# Altium PCB H.PcbDoc
Units mm, origin at the board's own origin, x right, y up, seen from the top; angles counter-clockwise.
Board outline 20.95 x 16.51 mm, 2 copper layers (Top Layer, Bottom Layer); 21 components, 10 nets, 42 pads, 7 vias.
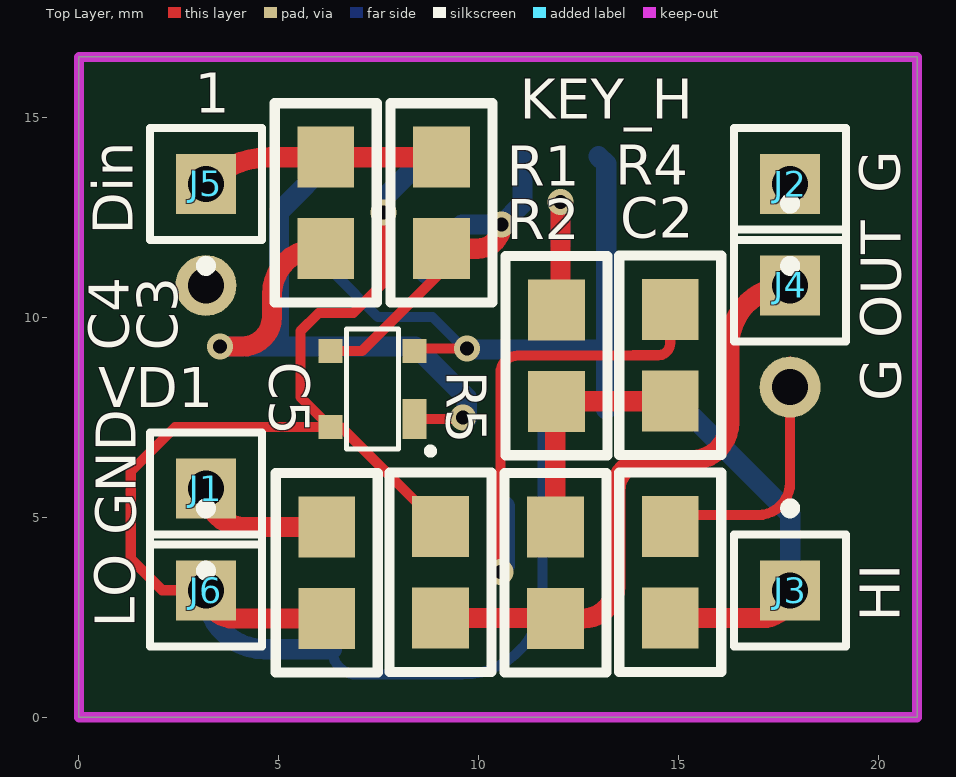
[diagram p0: Top Layer view]
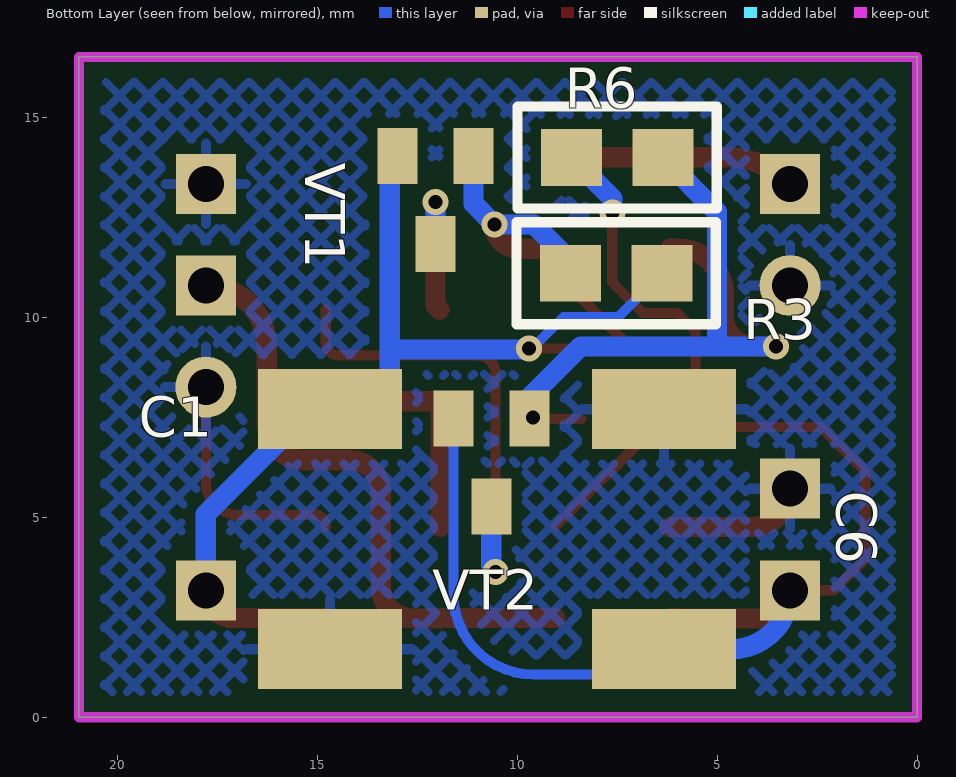
[diagram p1: Bottom Layer view, seen from below]

## Layer stack, top to bottom
Top Solder: solder mask 0.0102, Solder Resist, Dk 3.5
Top Layer: signal copper 0.0356
Dielectric 1: dielectric 0.32, FR-4, Dk 4.8
Bottom Layer: signal copper 0.0356
Bottom Solder: solder mask 0.0102, Solder Resist, Dk 3.5

## Board outline
0,0 20.955,0 20.955,16.51 0,16.51

## Design rules (kind name [scope] priority, off if disabled: settings)
Clearance [All] p1: gap=0.254
PolygonConnect [All] p1: connectstyle=Relief reliefconductorwidth=0.254 reliefentries=4 polygonreliefangle="90 Angle" airgapwidth=0.254
RoutingVias [All] p1: holewidth=0.711 width=1.27 viastyle="Through Hole" minholewidth=0.711 minwidth=1.27 maxholewidth=0.711 maxwidth=1.27
SolderMaskExpansion [All] p1: expansion=0.102
Width [All] p1: maxlimit=0.254 minlimit=0.254 preferedwidth=0.254
29 further rules are at their usual default settings.

## Components (designator, comment, footprint, x,y, rotation, side; value= is the part's Value field where it differs from the comment)
C1 "22,0" Cap_BIG 16.586,0.61 r180 bottom
C2 "0,1" CAP_SMALL 16.053,1.118 r90 top
C3 "100" CAP_SMALL 7.798,15.367 r270 top
C4 "100" CAP_SMALL 4.902,15.367 r270 top
C5 "0,1" CAP_SMALL 4.928,6.121 r270 top
C6 "22,0" Cap_BIG 8.23,0.61 r180 bottom
J1 "GND" PIN1 3.175,5.715 r180 top
J2 "G" PIN1 17.78,13.335 r180 top
J3 "HI" PIN1 17.78,3.175 r0 top
J4 "OUT" PIN1 17.78,10.795 r0 top
J5 "Din" PIN1 3.175,13.335 r180 top
J6 "LO" PIN1 3.175,3.175 r0 top
R1 "3" RES 13.183,11.524 r180 top
R2 "3" RES 13.157,6.096 r180 top
R3 "2,21" RES 10.008,12.344 r270 bottom
R4 "3" RES 16.027,11.532 r180 top
R5 "100k" RES 10.287,6.107 r180 top
R6 "2,21" RES 9.982,15.24 r270 bottom
VD1 "HSMS2805" SOT-143B 7.341,8.204 r90 top
VT1 "MMBT3640" SOT23-BEC_MMBT3640*(Primary) 12.04,12.929 r0 bottom
VT2 "MMBT2369" SOT23-BEC_MMBT3640*(Primary) 10.643,6.375 r0 bottom

## Footprints (in the part's own frame and the unit in brackets; to place one, negate y for a bottom-side part, rotate by r counter-clockwise, add the part's x,y. Pads: shape width x height; smd on the part's side, far side on the other; paste and mask are expansions set on the pad)
Cap_BIG [mm] "FROM_MAX"
  rect 3.6x2 smd: 1(1.905,7.092) 2(1.905,1.092)
  body extent 0,-0.01 3.81,8.19, height 2.54
CAP_SMALL [mil] "FROM_MAX"
  rect 60x55.98 smd: 1(53.71,50) 2(143.71,50)
  silkscreen extent 1,0 197,100, body extent 20,18 178,82, height 100
PIN1 [mm] "Connector; Plug"
  rect 1.5x1.5 hole 0.9: 1(0,0)
  silkscreen extent -1.4,-1.4 1.4,2.17
RES [mil] "FROM_MAX"
  rect 55.98x60 smd: 1(49,52.71) 2(49,142.71)
  silkscreen extent -1,0 99,196, body extent 17,19 81,177, height 100
SOT23-BEC_MMBT3640*(Primary) [mm]
  rect 1x1.4 smd: 1(-0.95,-1.1) 2(0.95,-1.1) 3(0,1.1)
SOT-143B [mm]
  rect 1x0.6 smd: 1(-0.75,-1.05)
  rect 0.6x0.6 smd: 2(0.95,-1.05) 3(-0.95,1.05) 4(0.95,1.05)
  silkscreen extent -1.5,-0.65 1.5,0.65

## Part data
C1 C6: library part CAP_BIG
C2 C3 C4 C5: library part CAP_SMALL
J1 J2 J3 J4 J5 J6: library part Socket, "Socket"
R1 R2 R3 R4 R5 R6: library part RES
VD1: library part HSMS-2805

## Free pads (board coordinates)
  round 1.524 hole 0.9: 1(3.175,10.795) 1(17.78,8.255)

## Via types
v1: diameter 0.65, hole 0.35, Top Layer to Bottom Layer, 7 vias

## Nets (pads, with @x,y where several pads share a name; then routed paths per layer and width w, separated by ;. In a path a pad name is that pad's centre, name@x,y a point inside that pad or via, vN(x,y) a via of type N, cw(c..) or ccw(c..) an arc to the next point about the centre after c; other vN are vias at no path point)
GND: C1.2 C2.2 C5.1 C6.1 J1.1 J2.1 pad.1 | length 10.7
  Top Layer w0.254: C2.2@15.095,5.08 ccw(c15.095,4.768) C2.2 cw(c15.07,4.768) 15.07,5.055 16.967,5.055 ccw(c16.967,5.867) 17.78,5.867 pad.1@17.78,8.89
  Top Layer w0.508: J1.1 ccw(c4.133,5.715) 4.133,4.757 C5.1
NetC1_1: C1.1 C2.1 J3.1 R3.2 VD1.2 VT1.2 | length 24.1
  Top Layer w0.254: VD1.2 8.457,9.22 v1(9.703,9.22)
  Top Layer w0.508: C2.1 17.087,2.482 ccw(c17.087,3.175) J3.1
  Bottom Layer w0.127: v1@9.822,9.202 v1@9.83,9.195
  Bottom Layer w0.254: R3.2 7.475,10.008 8.839,10.008 v1@9.677,9.169
  Bottom Layer w0.508: v1@9.83,9.195 13.106,9.195 13.183,9.271 ; VT1.2 13.183,13.836 13.183,9.271 ; C1.1@13.183,7.696 13.183,9.271 ; C1.1 15.158,7.702 17.78,5.08 J3.1@17.78,3.81
NetC3_1: C3.1 C4.1 J5.1 | length 6.2
  Top Layer w0.508: J5.1 cw(c4.787,11.723) 4.787,14.003 C4.1 C3.1 C3.1@8.966,14.104
NetC3_2: C3.2 R3.1 VD1.4 VT1.1 | length 10.5
  Top Layer w0.254: VD1.4 7.071,9.154 9.068,11.151 C3.2
  Top Layer w0.508: C3.2 9.964,11.717 ccw(c9.964,12.319) v1(10.566,12.319)
  Bottom Layer w0.508: R3.1 8.669,11.412 9.576,12.319 v1(10.566,12.319) 11.09,12.842 VT1.1
NetC4_2: C4.2 R6.2 VD1.1 VT2.1 | length 18
  Top Layer w0.254: VD1.1 9.562,7.454 v1(9.601,7.493)
  Top Layer w0.508: v1(3.531,9.271) 4.089,9.271 ccw(c4.089,10.008) 4.826,10.008 4.826,10.566 cw(c5.976,10.566) 5.976,11.717 C4.2
  Bottom Layer w0.508: v1(3.531,9.271) 5.004,9.271 ; R6.2 5.004,12.642 5.004,9.271 ; VT2.1 9.693,7.986 8.407,9.271 5.004,9.271
NetC5_2: C5.2 C6.2 J6.1 R5.1 R6.1 VD1.3 VT2.2 | length 41.1
  Top Layer w0.254: J6.1 2.083,3.175 1.295,3.962 1.295,6.147 2.403,7.254 VD1.3 ; v1@7.645,12.598 ccw(c7.62,12.598) v1(7.62,12.624) 7.62,10.871 6.858,10.109 5.994,10.109 5.537,9.652 5.537,8.008 VD1.3 ; R5.1 6.556,7.254 VD1.3
  Top Layer w0.508: J6.1 ccw(c3.879,3.175) 3.879,2.471 C5.2 ; C5.2@6.096,2.497 C5.2@6.111,2.482
  Bottom Layer w0.254: C6.2 ccw(c6.96,1.702) 6.96,1.067 9.579,1.067 ccw(c9.579,3.08) 11.593,3.08 VT2.2
  Bottom Layer w0.508: J6.1 ccw(c4.648,3.175) 4.648,1.702 C6.2 ; v1(7.62,12.624) 7.62,12.972 R6.1
NetJ4_1: J4.1 R2.2 R5.2 | length 15.3
  Top Layer w0.508: R5.2 11.902,2.482 R2.2 12.606,2.471 ccw(c12.606,3.277) 13.411,3.277 13.411,5.664 cw(c14.173,5.664) 14.173,6.426 15.316,6.426 ccw(c15.316,7.366) 16.256,7.366 16.256,9.271 cw(c17.78,9.271) J4.1
NetR1_1: R1.1 VT1.3 | length 3.8
  Top Layer w0.508: R1.1 12.04,10.287 v1(12.04,12.878)
  Bottom Layer w0.508: VT1.3 v1(12.04,12.878)
NetR1_2: R1.2 R2.1 R4.2 | length 6
  Top Layer w0.508: R2.1 11.913,7.874 R1.2 R4.2@14.775,7.899
NetR4_1: R4.1 VT2.3 | length 12.1
  Top Layer w0.254: v1(10.541,3.632) 10.541,8.56 ; 10.541,8.611 cw(c10.973,8.611) 10.973,9.042 13.868,9.042 13.868,9.05 14.478,9.05 ccw(c14.478,9.355) 14.783,9.355 R4.1
  Bottom Layer w0.508: v1(10.541,3.632) 10.643,3.785 VT2.3

## Polygon pours and split planes (outlines as drawn)
GND on Bottom Layer "Top Layer-No Net" (hatched 45Degree grid 0.508 track 0.203, remove dead copper, pour order 26): 20.32,15.875 0.635,15.875 0.635,0.635 20.32,0.635

## Keep-outs
Keep-Out Layer:
  the board outline again, w0.254

## Silkscreen, mask and mechanical layers (free items; w line width, h text height)
Top Overlay:
  circle w0.254: c8.788,6.655 r0.036
  text "1" at 2.896,15.113 h1
  text "KEY_H" at 11.024,14.961 h1
  text "G" at 20.549,7.899 h1 r90